# Altium PCB 毕设PCB.PcbDoc
Units mil, origin at the board's own origin, x right, y up, seen from the top; angles counter-clockwise.
Board outline 3230 x 2475 mil, 2 copper layers (Top Layer, Bottom Layer); 30 components, 29 nets, 127 pads, 4 vias.
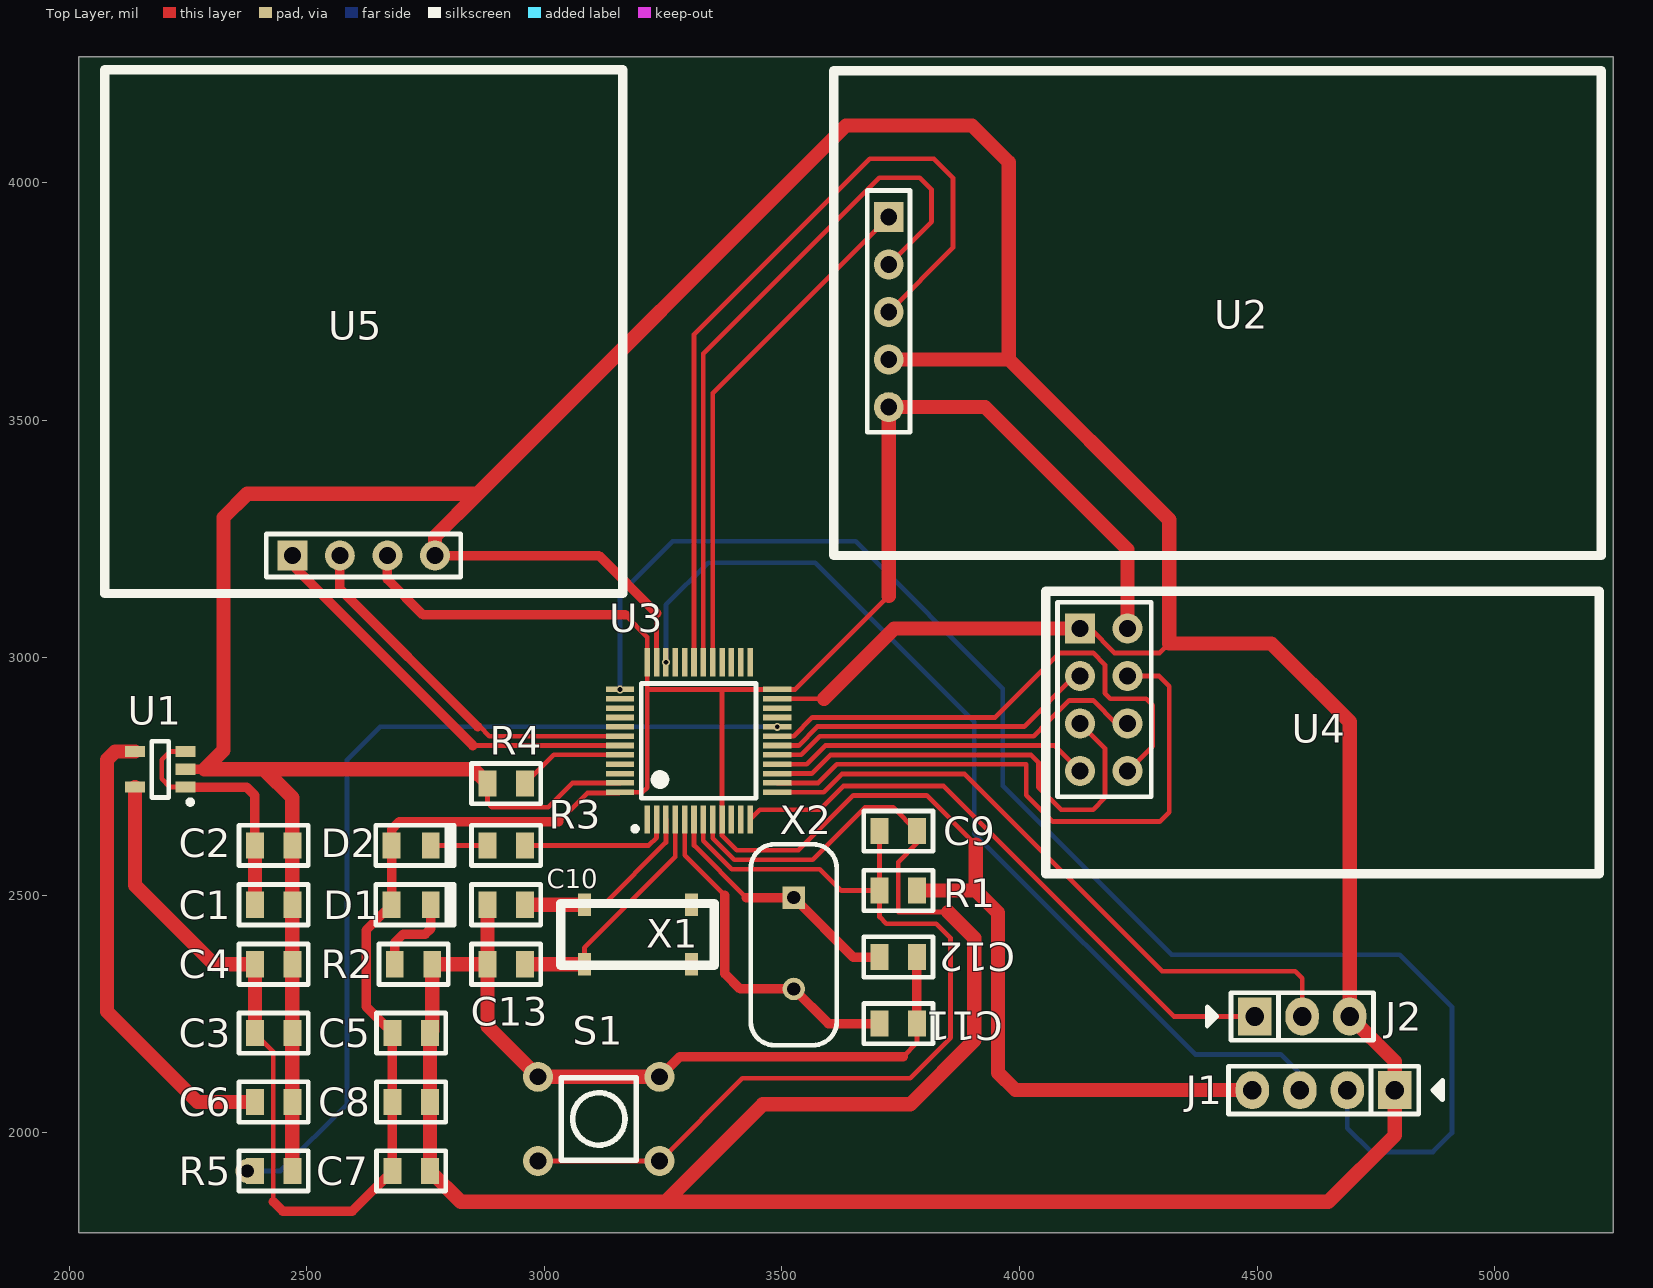
[diagram p0: Top Layer view]
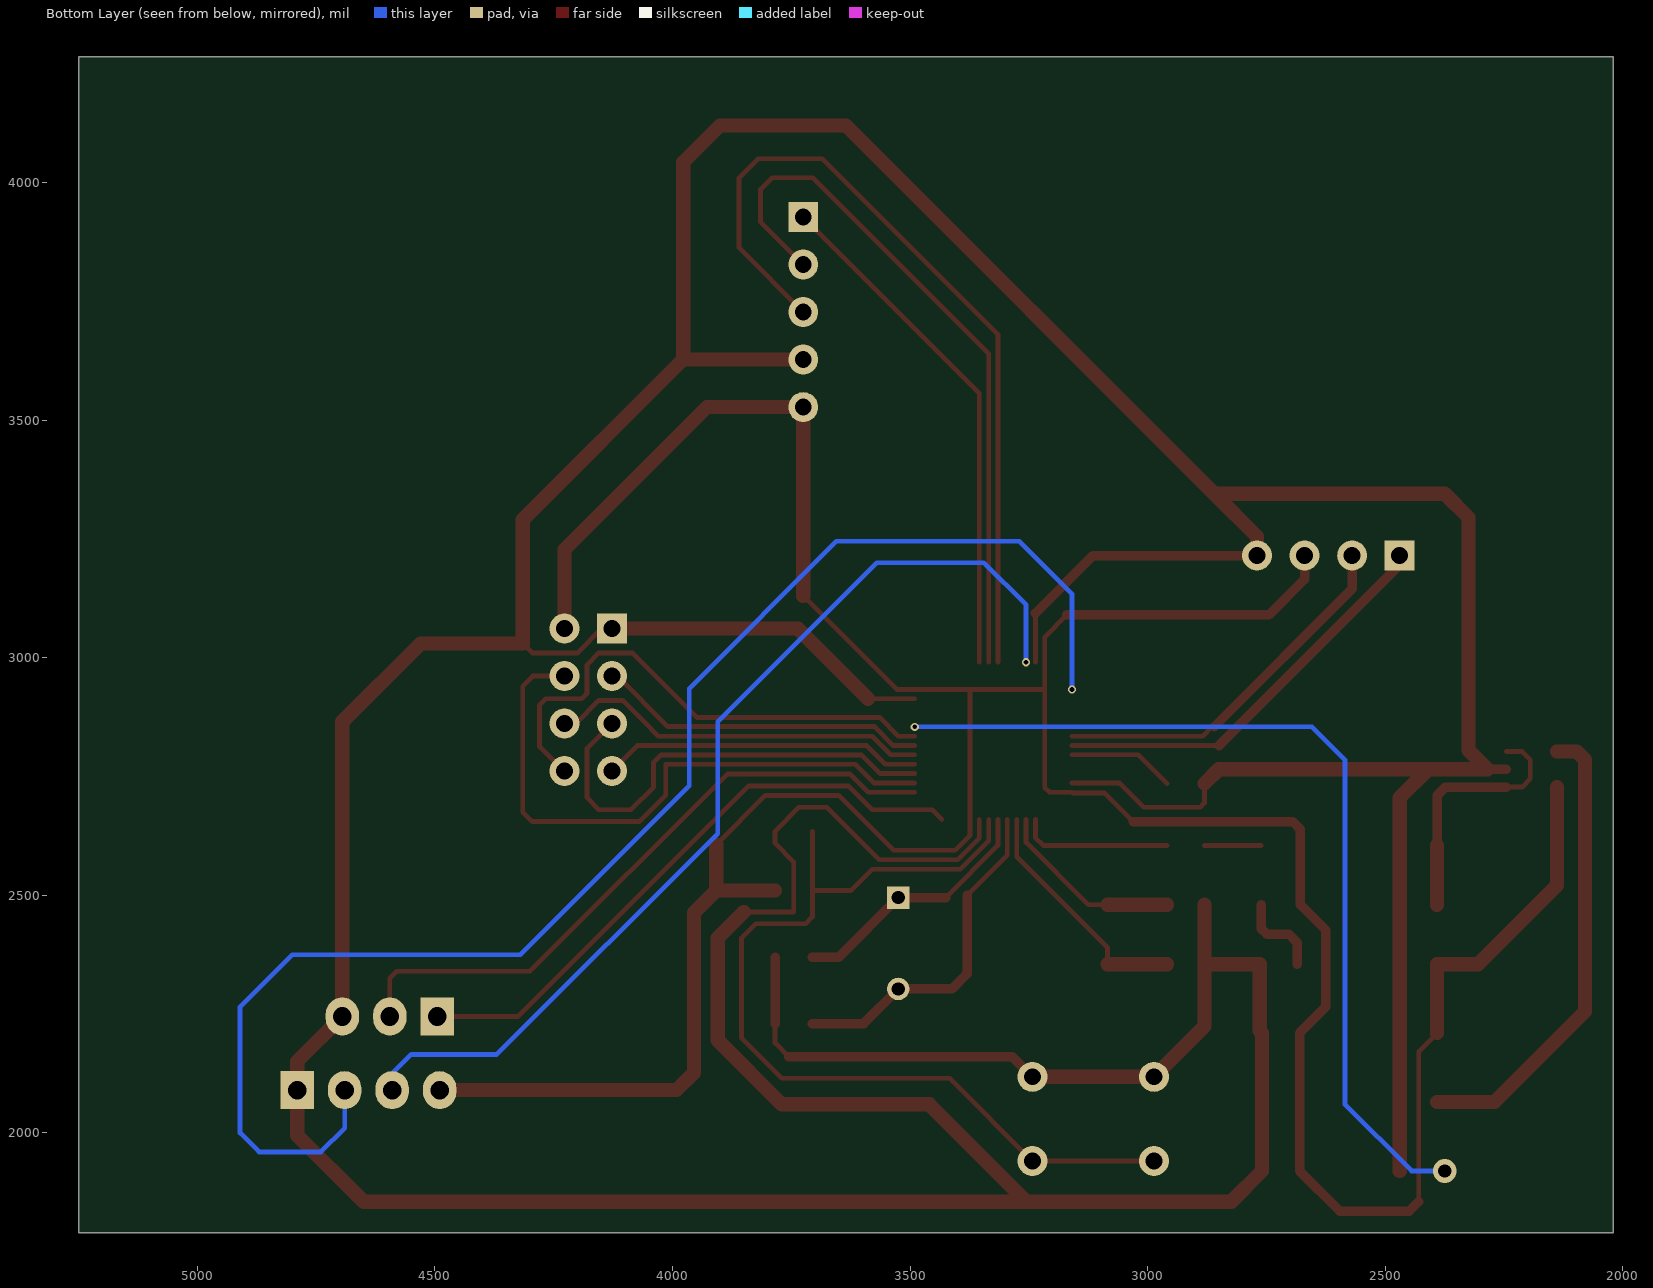
[diagram p1: Bottom Layer view, seen from below]
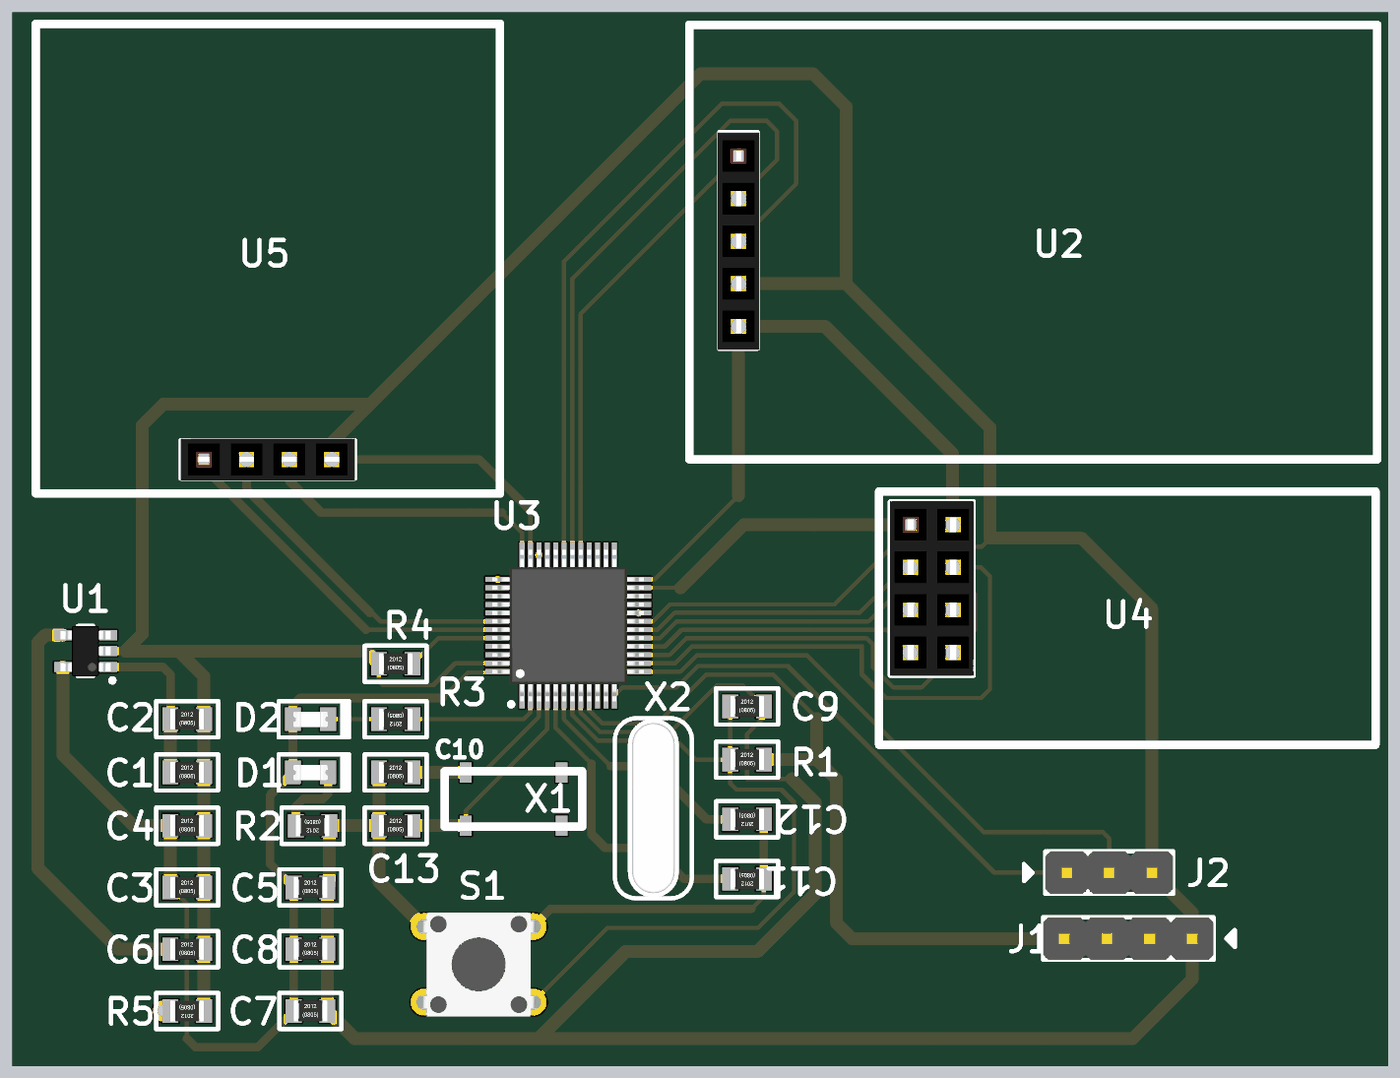
[diagram p2: 3D render of the assembled board from above, using the file's embedded part models]

## Layer stack, top to bottom
Top Solder: solder mask 0.4, Solder Resist, Dk 3.5
Top Layer: signal copper 1.4
Dielectric 1: dielectric 12.6, FR-4, Dk 4.8
Bottom Layer: signal copper 1.4
Bottom Solder: solder mask 0.4, Solder Resist, Dk 3.5

## Board outline
2020,1790 5250,1790 5250,4265 2020,4265

## Design rules (kind name [scope] priority, off if disabled: settings)
Clearance [All] p1: gap=5 ignorepadtopadclearanceinfootprint=TRUE except(0: Arc-Hole Track-Hole SMDPad-Hole THPad-Hole Via-Hole Fill-Hole Poly-Hole Region-Hole Text-Hole; 10: Arc-Fill Arc-Poly Arc-Region Arc-Text Track-Fill Track-Poly Track-Region Track-Text SMDPad-Text Via-Text Fill-Fill Fill-Poly Fill-Region Fill-Text Poly-Poly Poly-Region Poly-Text Region-Region Region-Text Text-Text)
PolygonConnect [All] p1: connectstyle=Relief reliefconductorwidth=10 reliefentries=4 polygonreliefangle="90 Angle" airgapwidth=10
RoutingVias [All] p1: holewidth=28 width=50 viastyle="Through Hole" minholewidth=28 minwidth=50 maxholewidth=28 maxwidth=50
SolderMaskExpansion [All] p1: expansion=4
Width [All] p1: maxlimit=60 minlimit=5 preferedwidth=10
30 further rules are at their usual default settings.

## Components (designator, comment, footprint, x,y, rotation, side; value= is the part's Value field where it differs from the comment)
C1 "104" 0805 2430.63,2480 r0 top
C2 "105" 0805 2430.63,2605 r0 top
C3 "105" 0805 2430.63,2210 r0 top
C4 "104" 0805 2430.63,2355 r0 top
C5 "104" 0805 2720,2210 r0 top
C6 "223" 0805 2430.63,2065 r0 top
C7 "104" 0805 2720,1920 r0 top
C8 "104" 0805 2720,2065 r0 top
C9 "104" 0805 3745,2635 r0 top
C10 "20P" 0805 2920,2480 r0 top
C11 "20P" 0805 3745,2230 r180 top
C12 "20P" 0805 3745,2370 r180 top
C13 "20P" 0805 2920,2355 r0 top
D1 "LED" LED-0805 2720,2480 r0 top (schematic designator LED1)
D2 "LED" LED-0805 2720,2605 r0 top (schematic designator LED2)
J1 "HDR1x4" PIN-4-2.54-1.0 4640,2090 r180 top
J2 "HDR1x3" PIN-3-2.54-1.0 4595,2245 r0 top
R1 "RES" 0805 3745,2510 r0 top
R2 "RES" 0805 2725,2355 r180 top
R3 "RES" 0805 2920,2605 r180 top
R4 "RES" 0805 2920,2735 r0 top
R5 "RES" 0805 2430.63,1920 r180 top
S1 "复位开关" 按键开关 3115,2030 r0 top
U1 "稳压ME6211-3.3" 稳压ME6211-3.3 2190,2765 r90 top
U2 "GPS" GPS 4455,3710 r180 top
U3 "STM32F103CxTx" QFP-48-0.5 3325,2825 r90 top
U4 "NRF24L01" NRF24L01 4565,2845 r180 top
U5 "OLED" OLED 2625,3685 r270 top
X1 "38k晶振" 38k晶振 3230,2495 r0 top
X2 "8MHZ" 晶振1 3525.52,2398.57 r270 top

## Footprints (in the part's own frame and the unit in brackets; to place one, negate y for a bottom-side part, rotate by r counter-clockwise, add the part's x,y. Pads: shape width x height; smd on the part's side, far side on the other; paste and mask are expansions set on the pad)
38k晶振 [mm]
  rect 0.7x1.2 smd: 1(-3.693,-3.556) 2(2.022,-3.556) 3(2.022,-0.381) 4(-3.693,-0.381)
  silkscreen extent -4.95,-3.61 3.25,-0.31
0805 [mm] "SMD, 0805"
  rect 0.95x1.4 smd: 1(-1,0) 2(1,0)
  silkscreen extent -1.85,-1.08 1.85,1.08, body extent -1,-0.62 1,0.63, height 0.45
GPS [mm]
  rect 1.6x1.6 hole 0.9: 1(18.544,-5.519)
  round 1.6 hole 0.9: 2(18.544,-2.979) 3(18.544,-0.439) 4(18.544,2.101) 5(18.544,4.641)
  silkscreen extent -19.54,-13.34 21.48,12.57, body extent 17.29,-6.91 19.79,6.04, height 8.6
LED-0805 [mm] "LED, SMD, 0805"
  rect 0.95x1.4 smd: 1(-1.05,0) 2(1.05,0)
  silkscreen extent -1.9,-1.08 2.3,1.08, body extent -1.03,-0.45 1.03,0.45, height 0.85
NRF24L01 [mm]
  rect 1.6x1.6 hole 0.9: 1(11.112,-5.498)
  round 1.6 hole 0.9: 2(8.572,-5.498) 3(11.112,-2.958) 4(8.572,-2.958) 5(11.112,-0.418) 6(8.572,-0.418) 7(11.112,2.122) 8(8.572,2.122)
  silkscreen extent -16.64,-7.49 12.95,7.62, body extent 7.31,-6.9 12.31,3.51, height 8.6
OLED [mm]
  rect 1.6x1.6 hole 0.9: 1(11.938,-3.937)
  round 1.6 hole 0.9: 2(11.938,-1.397) 3(11.938,1.143) 4(11.938,3.683)
  silkscreen extent -14.03,-13.97 13.97,13.72, body extent 10.69,-5.33 13.19,5.08, height 8.6
PIN-3-2.54-1.0 [mil] "Pin Header"
  rect 70x80 hole 39.37: 1(-100,0)
  oval 70x80 hole 39.37: 2(0,0) 3(100,0)
  silkscreen extent -200,-50 150,50, body extent -150,-50 150,50, height 398
PIN-4-2.54-1.0 [mil] "Pin Header"
  rect 70x80 hole 39.37: 1(-150,0)
  oval 70x80 hole 39.37: 2(-50,0) 3(50,0) 4(150,0)
  silkscreen extent -250,-50 200,50, body extent -200,-50 200,50, height 398
QFP-48-0.5 [mm] "QFP-48"
  rect 1.5x0.3 smd: 1(-4.2,2.75) 2(-4.2,2.25) 3(-4.2,1.75) 4(-4.2,1.25) 5(-4.2,0.75) 6(-4.2,0.25) 7(-4.2,-0.25) 8(-4.2,-0.75) 9(-4.2,-1.25) 10(-4.2,-1.75) 11(-4.2,-2.25) 12(-4.2,-2.75) 25(4.2,-2.75) 26(4.2,-2.25) 27(4.2,-1.75) 28(4.2,-1.25) 29(4.2,-0.75) 30(4.2,-0.25) 31(4.2,0.25) 32(4.2,0.75) 33(4.2,1.25) 34(4.2,1.75) 35(4.2,2.25) 36(4.2,2.75)
  rect 0.3x1.5 smd: 13(-2.75,-4.2) 14(-2.25,-4.2) 15(-1.75,-4.2) 16(-1.25,-4.2) 17(-0.75,-4.2) 18(-0.25,-4.2) 19(0.25,-4.2) 20(0.75,-4.2) 21(1.25,-4.2) 22(1.75,-4.2) 23(2.25,-4.2) 24(2.75,-4.2) 37(2.75,4.2) 38(2.25,4.2) 39(1.75,4.2) 40(1.25,4.2) 41(0.75,4.2) 42(0.25,4.2) 43(-0.25,4.2) 44(-0.75,4.2) 45(-1.25,4.2) 46(-1.75,4.2) 47(-2.25,4.2) 48(-2.75,4.2)
  silkscreen extent -4.83,-3.07 3.07,3.53, body extent -4.51,-4.51 4.51,4.51, height 1.6
按键开关 [mm]
  round 1.6 hole 0.9: 1(-3.256,2.235) 1(3.244,2.235) 2(-3.256,-2.265) 2(3.244,-2.265)
  silkscreen extent -2.01,-2.22 1.99,2.18, body extent -3.97,-3.12 3.95,3.08, height 5.1
晶振1 [mm]
  rect 1.2x1.2 hole 0.7: 1(-2.449,-0.013)
  round 1.2 hole 0.7: 2(2.431,-0.013)
  silkscreen extent -5.31,-2.31 5.44,2.29, body extent -5.28,-1.54 5.39,1.51, height 3.09
稳压ME6211-3.3 [mm]
  rect 0.6x1.05 smd: 1(-0.95,-1.4) 2(0,-1.4) 3(0.95,-1.4) 4(0.95,1.3) 5(-0.95,1.3)
  silkscreen extent -1.88,-1.78 1.5,0.4, body extent -1.5,-1.55 1.5,1.45, height 1.3

## Part data
C1 C2 C3 C4 C5 C6 C7 C8 C9 C10 C11 C12 C13: library part CAP, "Capacitor"
J1 J2: "Connector"
R1 R2 R3 R4 R5: "Resistor"
S1: library part 按键开关
U3: "MCU"
X2: library part 晶振1（单片机）

## Via types
v1: diameter 17, hole 10, Top Layer to Bottom Layer, 3 vias
v2: diameter 50, hole 28, Top Layer to Bottom Layer, 1 vias

## Nets (pads, with @x,y where several pads share a name; then routed paths per layer and width w, separated by ;. In a path a pad name is that pad's centre, name@x,y a point inside that pad or via, vN(x,y) a via of type N, cw(c..) or ccw(c..) an arc to the next point about the centre after c; other vN are vias at no path point)
+5: C1.1 C2.1 U1.1 U1.3 | length 538.1
  Top Layer w10: U1.1 2212.4,2727.6 2195,2745 2195,2785 2212.4,2802.4 U1.3
  Top Layer w20: U1.1 2373.66,2727.6 2391.26,2710 C2.1
  Top Layer w30: C1.1 C2.1
BOOT0: R4.2 U3.44 | length 225.3
  Top Layer w10: R4.2 3019.84,2795.47 U3.44
BOOT1: R5.2 U3.20 | length 1927.1
  Bottom Layer w10: v2(2375,1920) 2445,1920 2585,2060 2585,2785 2654.53,2854.53 v1(3490.35,2854.53)
GND: C1.2 C2.2 C3.2 C4.2 C5.2 C6.2 C7.2 C8.2 C9.2 C10.1 C11.1 C12.1 C13.1 J1.1 J2.3 R2.1 R4.1 R5.1 S1.1 U1.2 U2.4 U3.8 U3.23 U3.35 U3.47 U4.1 U5.4 | length 14912.7
  Top Layer w10: C5.2 C5.2@2764.37,2215 ; R4.1 2880.63,2694.37 2890,2685 3008.27,2685 3059.68,2736.42 U3.47 ; U3.35 3236.42,3093.58 ; U3.8 3354.53,2620.47 3400,2575 3565,2575 3675,2685 3734.37,2685 C9.2 3784.37,2609.37 3745,2570 3745,2465 3850,2465 ; U3.23 3588.58,2913.58 ; 3755,2160 3784.37,2189.37 C11.1 ; U4.1 4148.54,3061.46 4200,3010 4295,3010 4315,3030
  Top Layer w20: U1.2 2285,2765 ; U5.4 3115,3215 3236.42,3093.58 ; S1.1@3242.73,2117.98 3284.76,2160 3755,2160 ; C11.1 C12.1
  Top Layer w30: R5.1 C6.2 C3.2 C4.2 C1.2 C2.2 2470,2705 2410,2765 ; C5.2 C8.2 C7.2 2824.37,1855 3255,1855 ; C5.2@2764.37,2215 R2.1 C13.1 ; U5.4 2770,3255 2860,3345 ; C10.1 C13.1 ; R4.1 2850.63,2765 2410,2765 ; S1.1@3242.73,2117.98 2986.83,2117.98 2880.63,2224.17 C13.1 ; 3588.58,2913.58 3736.46,3061.46 U4.1 ; U2.4 3977.72,3627.28 ; 3850,2465 3905,2410 3905,2195 3770,2060 3460,2060 3255,1855 ; 2410,2765 2285,2765 2325,2805 2325,3295 2375,3345 2860,3345 ; 2860,3345 3635,4120 3900,4120 3977.72,4042.28 3977.72,3627.28 ; 3255,1855 4650,1855 4790,1995 J1.1 4790,2150 J2.3 4695,2865 4530,3030 4315,3030 4315,3290 3977.72,3627.28
NetC6_1: C6.1 U1.4 | length 985.9
  Top Layer w30: U1.4 2097.4,2802.4 2080,2785 2080,2255.2 2270.2,2065 C6.1
NetLED1_2: D1.2 R2.2 | length 183.5
  Top Layer w20: R2.2 2685.63,2400.63 2702.98,2417.98 2749.32,2417.98 2761.34,2430 D1.2
NetLED2_2: D2.2 R3.2 | length 119.3
  Top Layer w10: D2.2 R3.2
NRST: C9.1 R1.1 S1.2 U3.7 | length 1992.7
  Top Layer w10: S1.2@2986.83,1940.81 3242.73,1940.81 3416.92,2115 3770,2115 3855,2200 3855,2410 3825,2440 3720,2440 3705.63,2454.37 R1.1 ; U3.7 3334.84,2615.16 3395,2555 3580,2555 3625,2510 R1.1 ; C9.1 R1.1
OSC_IN: C11.2 U3.5 X2.2 | length 728.8
  Top Layer w10: U3.5 3295.47,2584.53 3380,2500
  Top Layer w20: 3380,2500 3380,2335 3412.13,2302.87 X2.2 3597.87,2230 C11.2
OSC_OUT: C12.2 U3.6 X2.1 | length 542.6
  Top Layer w10: U3.6 3315.16,2604.84 3425,2495
  Top Layer w20: 3425,2495 X2.1 3650,2370 C12.2
PA2: J2.1 U3.12 | length 1291.8
  Top Layer w10: U3.12 3453.62,2680 3580,2680 3630,2730 3840,2730 4325,2245 J2.1
PA3: J2.2 U3.13 | length 1378.6
  Top Layer w10: U3.13 3587.99,2716.73 3626.26,2755 3885,2755 4300,2340 4580,2340 4595,2325 J2.2
PA4: U3.14 U4.4 | length 1298.7
  Top Layer w10: U3.14 3576.26,2736.42 3615.63,2775.79 4014.21,2775.79 4014.21,2710.79 4070,2655 4295,2655 4315,2675 4315,2940 4293.54,2961.46 U4.4
PA5: U3.15 U4.5 | length 972.6
  Top Layer w10: U3.15 3562.83,2756.1 3601.73,2795 4025,2795 4040,2780 4040,2727.6 4087.6,2680 4155,2680 4180,2705 4180,2808.98 U4.5
PA6: U3.16 U4.7 | length 675.6
  Top Layer w10: U3.16 3552.05,2775.79 3591.26,2815 4073.98,2815 U4.7
PA7: U3.17 U4.6 | length 804.8
  Top Layer w10: U3.17 3540.47,2795.47 3579.84,2834.84 4030,2834.84 4045,2849.84 4045,2850 4105,2910 4155,2910 4203.54,2861.46 U4.6
PA8: U2.1 U3.29 | length 1090.4
  Top Layer w10: U3.29 3354.53,3556.89 U2.1
PA9: U2.2 U3.30 | length 1488.4
  Top Layer w10: U3.30 3334.84,3639.84 3705,4010 3790,4010 3815,3985 3815,3917.36 U2.2
PA10: U2.3 U3.31 | length 1743.1
  Top Layer w10: U3.31 3315.16,3680.16 3685,4050 3820,4050 3860,4010 3860,3862.36 U2.3
PB0: U3.18 U4.3 | length 697.8
  Top Layer w10: U3.18 3535.16,2815.16 3575,2855 4010,2855 4116.46,2961.46 U4.3
PB1: U3.19 U4.8 | length 1103.4
  Top Layer w10: U3.19 3525,2834.84 3564.37,2874.21 3949.21,2874.21 4085,3010 4155.35,3010 4180,2985.35 4180,2925 4191.42,2913.58 4266.42,2913.58 4280,2900 4280,2813.94 U4.8
PB6: U3.42 U5.2 | length 783.5
  Top Layer w10: 2865,2854.53 2884.69,2834.84 U3.42
  Top Layer w20: U5.2 2570,3144.68 2860.16,2854.53
PB7: U3.43 U5.1 | length 867
  Top Layer w10: U5.1@2470,3195 U5.1 ; 2849.84,2815.16 U3.43
  Top Layer w20: U5.1@2470,3195 2849.84,2815.16
PC13: R3.1 U3.2 | length 322.1
  Top Layer w10: R3.1 3220,2605 3236.42,2621.42 U3.2
PC14: C10.2 U3.3 X1.4 | length 399.6
  Top Layer w10: X1.4 3125,2480 3256.1,2611.1 U3.3
  Top Layer w30: C10.2 X1.4
PC15: C13.2 U3.4 X1.1 | length 509.1
  Top Layer w10: X1.1 3084.61,2389.61 3275.79,2580.79 U3.4
  Top Layer w30: C13.2 X1.1
SWCLK: J1.2 U3.37 | length 3125.7
  Bottom Layer w10: v1(3159.65,2933.27) 3159.65,3134.65 3270,3245 3655,3245 3965,2935 3965,2730 4320,2375 4800,2375 4910,2265 4910,2000 4870,1960 4740,1960 4690,2010 J1.2
SWDIO: J1.3 U3.34 | length 2109.4
  Bottom Layer w10: v1(3256.1,2990.35) 3256.1,3111.1 3345,3200 3570,3200 3905,2865 3905,2630 4370,2165 4550,2165 4590,2125 J1.3
VCC: C3.1 C4.1 C5.1 C7.1 C8.1 D1.1 D2.1 J1.4 R1.2 U1.5 U2.5 U3.9 U3.24 U3.36 U3.48 U4.2 U5.3 | length 7539.8
  Top Layer w10: C3.1 2430,2171.26 2430,1855 ; 3030.35,2655 3090.35,2715 3157.91,2715 U3.48 3206.73,2716.73 3216.73,2726.73 3216.73,2930 ; 3170,3090 3216.73,3043.27 U3.36 3216.73,2930 ; 3724.92,3129.92 3528.27,2933.27 U3.24 3375,2933.27 ; 3908.27,2606.73 3805,2710 3650,2710 3535,2595 3405,2595 3374.21,2625.79 U3.9 3374.21,2932.48 3375,2933.27 ; 3216.73,2930 3220,2933.27 3375,2933.27
  Top Layer w20: 2430,1855 2450,1835 2595.63,1835 C7.1 C8.1 C5.1 2625,2265.63 2625,2426.34 D1.1 D2.1 2678.66,2638.66 2695,2655 3030.35,2655 ; U5.3 2670,3165 2745,3090 3170,3090
  Top Layer w30: U1.5 2138.82,2521.18 2305,2355 C4.1 C3.1 ; 3724.92,3129.92 U2.5 3927.72,3527.28 4227.52,3227.48 U4.2 ; R1.2 3908.27,2510 ; 3908.27,2606.73 3908.27,2510 ; J1.4 3991.54,2090 3955,2126.54 3955,2463.27 3908.27,2510
pads on no net: U3.1 U3.10 U3.11 U3.21 U3.22 U3.25 U3.26 U3.27 U3.28 U3.32 U3.33 U3.38 U3.39 U3.40 U3.41 U3.45 U3.46 X1.2 X1.3